# Altium PCB 电机驱动PCB.PcbDoc
Units mil, origin at the board's own origin, x right, y up, seen from the top; angles counter-clockwise.
Board outline 6000 x 4000 mil, 2 copper layers (Top Layer, Bottom Layer); 8 components, 32 nets, 86 pads, 1 vias.
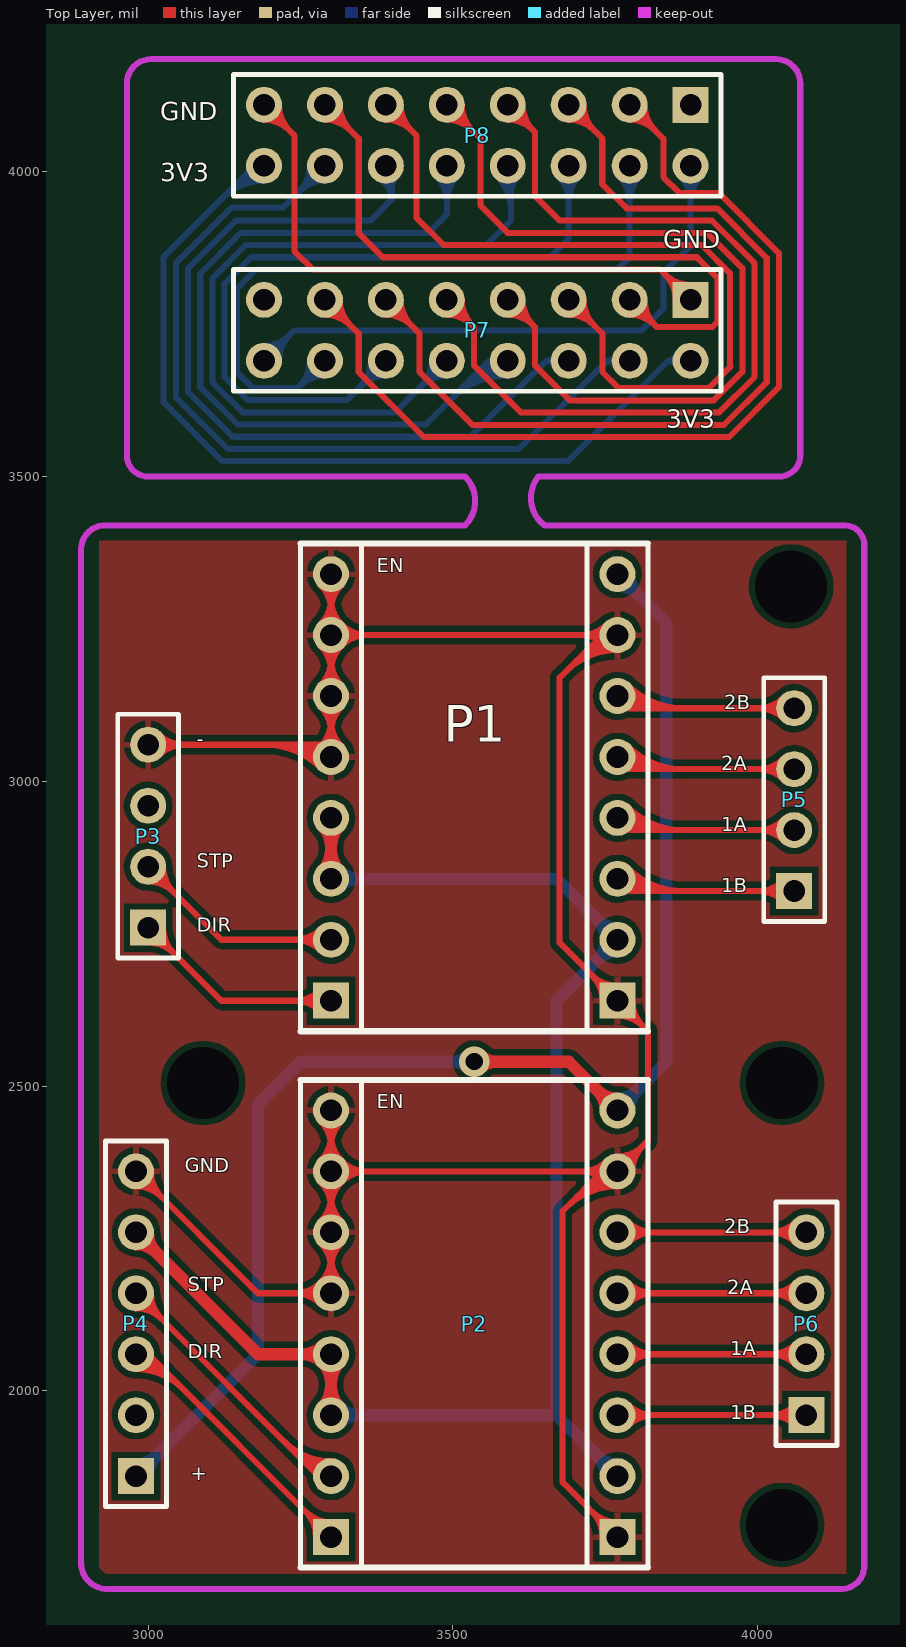
[diagram p0: Top Layer view]
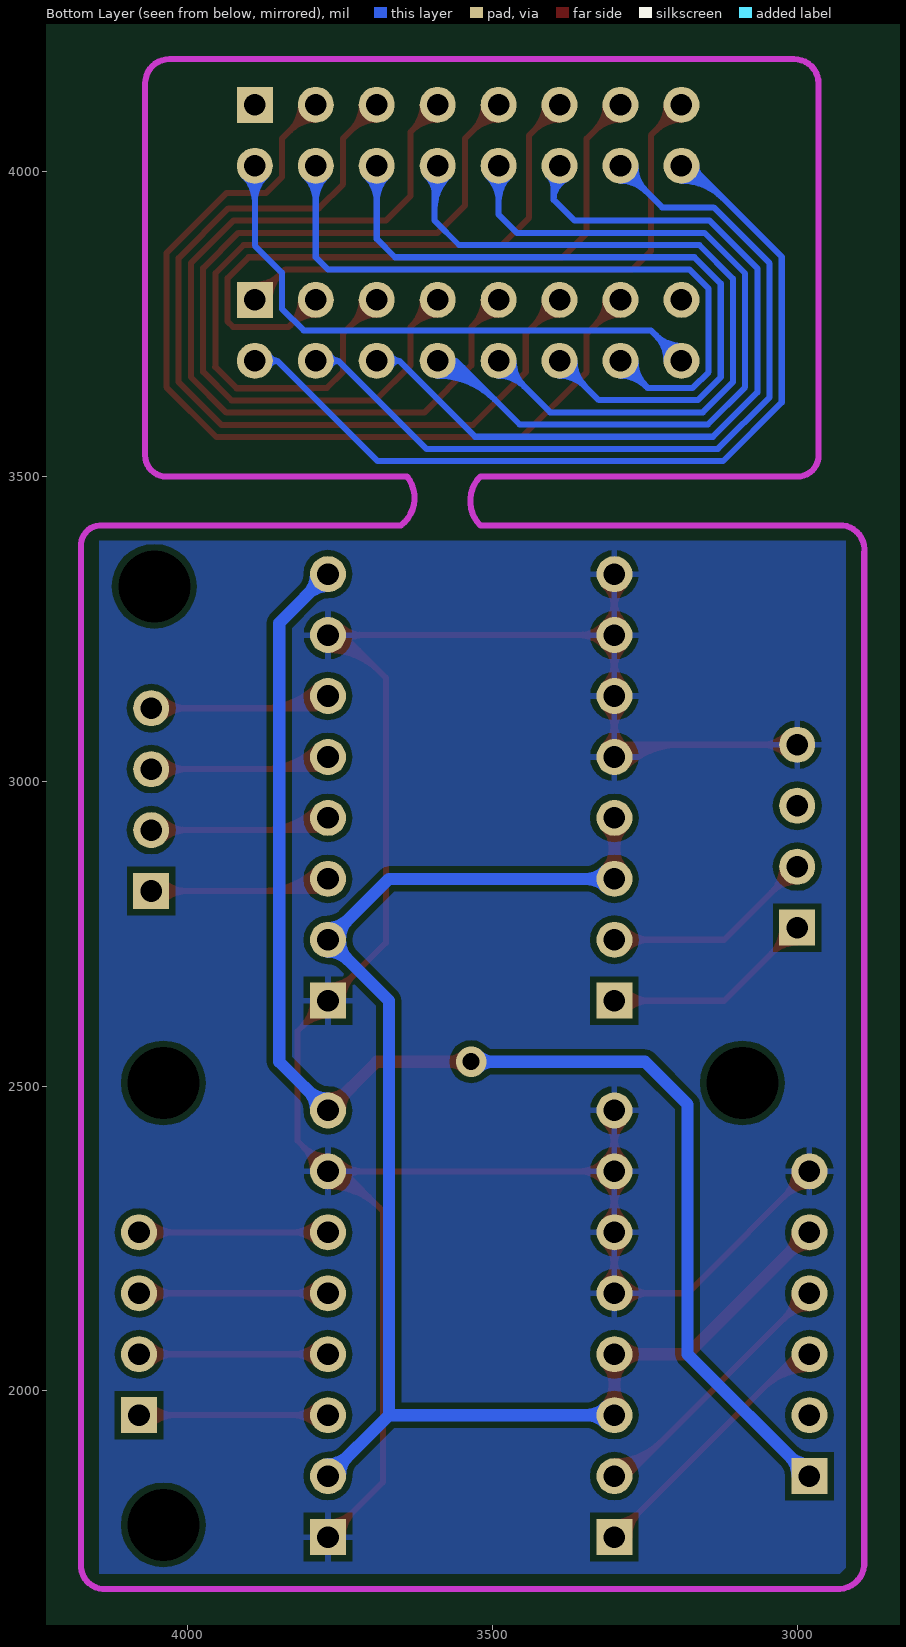
[diagram p1: Bottom Layer view, seen from below]

## Layer stack, top to bottom
Top Layer: signal copper 1.4
Dielectric: dielectric 12.6, FR-4, Dk 4.8
Bottom Layer: signal copper 1.4

## Board outline
1000,1000 7000,1000 7000,5000 1000,5000

## Design rules (kind name [scope] priority, off if disabled: settings)
Clearance [All] p1: gap=10
PolygonConnect [All] p1: connectstyle=Relief reliefconductorwidth=10 reliefentries=4 polygonreliefangle="90 Angle"
RoutingVias [All] p1: holewidth=28 width=50 viastyle="Through Hole" minholewidth=28 minwidth=50 maxholewidth=28 maxwidth=50
SilkscreenOverComponentPads [All] p1: minsilkscreentomaskgap=10
SolderMaskExpansion [All] p1: expansion=4
Width [All] p1: maxlimit=100 minlimit=10 preferedwidth=10
27 further rules are at their usual default settings.

## Components (designator, comment, footprint, x,y, rotation, side; value= is the part's Value field where it differs from the comment)
P1 "A4988 DRIVER" A4988 3300,3140 r0 top
P2 "A4988 DRIVER" A4988 3300,2260 r0 top
P3 "接入口1" HDR1X4 3000,2760 r90 top
P4 "接入口2" HDR1X6 2980,1860 r90 top
P5 "步进电机1" HDR1X4 4060,2820 r90 top
P6 "步进电机2" HDR1X4 4080,1960 r90 top
P7 "OLED" HDR2X8 3890,3790 r180 top
P8 "OLED" HDR2X8 3890,4110 r180 top

## Footprints (in the part's own frame and the unit in brackets; to place one, negate y for a bottom-side part, rotate by r counter-clockwise, add the part's x,y. Pads: shape width x height; smd on the part's side, far side on the other; paste and mask are expansions set on the pad)
A4988 [mm]
  round 1.5 hole 0.9: 1(0,5.08) 2(11.938,5.08) 3(0,2.54) 4(11.938,2.54) 5(0,0) 6(11.938,0) 7(0,-2.54) 8(11.938,-2.54) 9(0,-5.08) 10(11.938,-5.08) 11(0,-7.62) 12(11.938,-7.62) 13(0,-10.16) 14(11.938,-10.16)
  rect 1.5x1.5 hole 0.9: 15(0,-12.7) 16(11.938,-12.7)
  silkscreen extent -1.27,-13.97 13.21,6.35
HDR1X4 [mm]
  rect 1.5x1.5 hole 0.9: 1(0,0)
  round 1.5 hole 0.9: 2(2.54,0) 3(5.08,0) 4(7.62,0)
  silkscreen extent -1.27,-1.27 8.89,1.27
HDR1X6 [mm] "Connector; Header; 6 Position"
  rect 1.5x1.5 hole 0.9: 1(0,0)
  round 1.5 hole 0.9: 2(2.54,0) 3(5.08,0) 4(7.62,0) 5(10.16,0) 6(12.7,0)
  silkscreen extent -1.27,-1.27 13.97,1.27
HDR2X8 [mm] "Connector; Header; 8x2 Position"
  rect 1.5x1.5 hole 0.9: 1(0,0)
  round 1.5 hole 0.9: 2(0,2.54) 3(2.54,0) 4(2.54,2.54) 5(5.08,0) 6(5.08,2.54) 7(7.62,0) 8(7.62,2.54) 9(10.16,0) 10(10.16,2.54) 11(12.7,0) 12(12.7,2.54) 13(15.24,0) 14(15.24,2.54) 15(17.78,0) 16(17.78,2.54)
  silkscreen extent -1.27,-1.27 19.05,3.81

## Part data
P1 P2: "A4988步进电机驱动模块"
P3 P5 P6: library part "Header 4", "Header, 4-Pin"
P4: library part "Header 6", "Header, 6-Pin"
P7 P8: library part "Header 8X2", "Header, 8-Pin, Dual row"

## Free pads (board coordinates)
  round 60 hole 118.11: 0(3090,2505) 0(4040,1780) 0(4040,2505) 0(4055,3320)

## Via types
v1: diameter 50, hole 28, Top Layer to Bottom Layer, 1 vias

## Nets (pads, with @x,y where several pads share a name; then routed paths per layer and width w, separated by ;. In a path a pad name is that pad's centre, name@x,y a point inside that pad or via, vN(x,y) a via of type N, cw(c..) or ccw(c..) an arc to the next point about the centre after c; other vN are vias at no path point)
1A1: P1.10 P5.2 | length 733.2
  Top Layer w10: P1.10@3766.13,2936.13 ccw(c3805.07,2975.07) 3805.07,2920 ; P1.10 3790,2920 P5.2 ; P1.10@3773.2,2943.2 ccw(c3829.21,2999.21) 3829.21,2920 ; P1.10@3780.27,2950.27 ccw(c3853.36,3023.36) 3853.36,2920 ; P1.10@3787.34,2957.34 ccw(c3877.5,3047.5) 3877.5,2920 ; P5.2@4042.66,2902.66 ccw(c4000.79,2860.79) 4000.79,2920 ccw(c4000.79,2979.21) P5.2@4042.66,2937.34 ; P5.2@4049.73,2909.73 ccw(c4024.93,2884.93) 4024.93,2920 ccw(c4024.93,2955.07) P5.2@4049.73,2930.27
1A2: P2.10 P6.2 | length 606.2
  Top Layer w10: P2.10 P6.2 ; P2.10@3780.27,2049.73 cw(c3805.07,2024.93) 3805.07,2060 cw(c3805.07,2095.07) P2.10@3780.27,2070.27 ; P2.10@3787.34,2042.66 cw(c3829.21,2000.79) 3829.21,2060 cw(c3829.21,2119.21) P2.10@3787.34,2077.34 ; P6.2@4062.66,2042.66 ccw(c4020.79,2000.79) 4020.79,2060 ccw(c4020.79,2119.21) P6.2@4062.66,2077.34 ; P6.2@4069.73,2049.73 ccw(c4044.93,2024.93) 4044.93,2060 ccw(c4044.93,2095.07) P6.2@4069.73,2070.27
1B1: P1.12 P5.1 | length 733.2
  Top Layer w10: P1.12@3766.13,2836.13 ccw(c3805.07,2875.07) 3805.07,2820 ; P1.12 3790,2820 P5.1 ; P1.12@3773.2,2843.2 ccw(c3829.21,2899.21) 3829.21,2820 ; P1.12@3780.27,2850.27 ccw(c3853.36,2923.36) 3853.36,2820 ; P1.12@3787.34,2857.34 ccw(c3877.5,2947.5) 3877.5,2820 ; P5.1@4042.66,2802.66 ccw(c4000.79,2760.79) 4000.79,2820 ccw(c4000.79,2879.21) P5.1@4042.66,2837.34 ; P5.1@4049.73,2809.73 ccw(c4024.93,2784.93) 4024.93,2820 ccw(c4024.93,2855.07) P5.1@4049.73,2830.27
1B2: P2.12 P6.1 | length 606.2
  Top Layer w10: P2.12 P6.1 ; P2.12@3780.27,1949.73 cw(c3805.07,1924.93) 3805.07,1960 cw(c3805.07,1995.07) P2.12@3780.27,1970.27 ; P2.12@3787.34,1942.66 cw(c3829.21,1900.79) 3829.21,1960 cw(c3829.21,2019.21) P2.12@3787.34,1977.34 ; P6.1@4062.66,1942.66 ccw(c4020.79,1900.79) 4020.79,1960 ccw(c4020.79,2019.21) P6.1@4062.66,1977.34 ; P6.1@4069.73,1949.73 ccw(c4044.93,1924.93) 4044.93,1960 ccw(c4044.93,1995.07) P6.1@4069.73,1970.27
2A1: P1.8 P5.3 | length 733.2
  Top Layer w10: P1.8@3766.13,3036.13 ccw(c3805.07,3075.07) 3805.07,3020 ; P1.8 3790,3020 P5.3 ; P1.8@3773.2,3043.2 ccw(c3829.21,3099.21) 3829.21,3020 ; P1.8@3780.27,3050.27 ccw(c3853.36,3123.36) 3853.36,3020 ; P1.8@3787.34,3057.34 ccw(c3877.5,3147.5) 3877.5,3020 ; P5.3@4042.66,3002.66 ccw(c4000.79,2960.79) 4000.79,3020 ccw(c4000.79,3079.21) P5.3@4042.66,3037.34 ; P5.3@4049.73,3009.73 ccw(c4024.93,2984.93) 4024.93,3020 ccw(c4024.93,3055.07) P5.3@4049.73,3030.27
2A2: P2.8 P6.3 | length 606.2
  Top Layer w10: P2.8 P6.3 ; P2.8@3780.27,2149.73 cw(c3805.07,2124.93) 3805.07,2160 cw(c3805.07,2195.07) P2.8@3780.27,2170.27 ; P2.8@3787.34,2142.66 cw(c3829.21,2100.79) 3829.21,2160 cw(c3829.21,2219.21) P2.8@3787.34,2177.34 ; P6.3@4062.66,2142.66 ccw(c4020.79,2100.79) 4020.79,2160 ccw(c4020.79,2219.21) P6.3@4062.66,2177.34 ; P6.3@4069.73,2149.73 ccw(c4044.93,2124.93) 4044.93,2160 ccw(c4044.93,2195.07) P6.3@4069.73,2170.27
2B1: P1.6 P5.4 | length 733.2
  Top Layer w10: P1.6@3766.13,3136.13 ccw(c3805.07,3175.07) 3805.07,3120 ; P1.6 3790,3120 P5.4 ; P1.6@3773.2,3143.2 ccw(c3829.21,3199.21) 3829.21,3120 ; P1.6@3780.27,3150.27 ccw(c3853.36,3223.36) 3853.36,3120 ; P1.6@3787.34,3157.34 ccw(c3877.5,3247.5) 3877.5,3120 ; P5.4@4042.66,3102.66 ccw(c4000.79,3060.79) 4000.79,3120 ccw(c4000.79,3179.21) P5.4@4042.66,3137.34 ; P5.4@4049.73,3109.73 ccw(c4024.93,3084.93) 4024.93,3120 ccw(c4024.93,3155.07) P5.4@4049.73,3130.27
2B2: P2.6 P6.4 | length 606.2
  Top Layer w10: P2.6 P6.4 ; P2.6@3780.27,2249.73 cw(c3805.07,2224.93) 3805.07,2260 cw(c3805.07,2295.07) P2.6@3780.27,2270.27 ; P2.6@3787.34,2242.66 cw(c3829.21,2200.79) 3829.21,2260 cw(c3829.21,2319.21) P2.6@3787.34,2277.34 ; P6.4@4062.66,2242.66 ccw(c4020.79,2200.79) 4020.79,2260 ccw(c4020.79,2319.21) P6.4@4062.66,2277.34 ; P6.4@4069.73,2249.73 ccw(c4044.93,2224.93) 4044.93,2260 ccw(c4044.93,2295.07) P6.4@4069.73,2270.27
3.3V: P1.9 P1.11 P1.14 P2.9 P2.11 P2.14 P4.5 | length 3261.7
  Top Layer w20: P4.5@2980,2240.47 cw(c2980,2193.33) 3013.34,2226.66 cw(c3046.67,2260) P4.5@2999.53,2260 ; P4.5 3180,2060 P2.9 P2.11 ; P2.11@3286.19,1973.81 ccw(c3252.86,2007.14) 3300,2007.14 ccw(c3347.14,2007.14) P2.11@3313.81,1973.81 ; P2.9@3286.19,2073.81 cw(c3252.86,2107.14) 3252.86,2060 cw(c3252.86,2012.86) 3286.19,2046.19 cw(c3252.86,2012.86) 3300,2012.86 cw(c3347.14,2012.86) P2.9@3313.81,2046.19 ; P1.11@3286.19,2853.81 ccw(c3252.86,2887.14) 3300,2887.14 ccw(c3347.14,2887.14) P1.11@3313.81,2853.81 ; P1.9@3286.19,2926.19 cw(c3252.86,2892.86) 3300,2892.86 cw(c3347.14,2892.86) P1.9@3313.81,2926.19 ; P1.11 P1.9
  Bottom Layer w20: P2.11 3670,1960 ; P1.11 3670,2840 P1.14 3670,2640 3670,1960 ; P2.11@3313.81,1946.19 cw(c3347.14,1912.86) 3347.14,1960 cw(c3347.14,2007.14) P2.11@3313.81,1973.81 ; P1.11@3313.81,2826.19 cw(c3347.14,2792.86) 3347.14,2840 cw(c3347.14,2887.14) P1.11@3313.81,2853.81 ; P2.14@3750.47,1860 ccw(c3703.33,1860) 3736.66,1893.34 ccw(c3770,1926.67) P2.14@3770,1879.53 ; P2.14 3670,1960 ; P1.14@3770,2720.47 ccw(c3770,2673.33) 3736.66,2706.66 ccw(c3703.33,2740) 3750.47,2740 ccw(c3703.33,2740) 3736.66,2773.34 ccw(c3770,2806.67) P1.14@3770,2759.53
3.3V1: P7.2 P8.16 | length 1660.4
  Bottom Layer w10: 3122.52,3957.52 cw(c3190,3890.04) P8.16@3190,3985.47 ; 3139.59,3974.59 cw(c3190,3924.19) P8.16@3190,3995.47 ; 3156.66,3991.66 cw(c3190,3958.33) P8.16@3190,4005.47 ; 3158.74,3993.74 ccw(c3142.47,4010) P8.16@3165.47,4010 ; P8.16 3175,4010 3025.47,3860.47 3025.47,3621.85 3121.85,3525.47 3688.44,3525.47 3852.97,3690 ; P7.2@3867.42,3680.43 ccw(c3852.97,3674.32) 3852.97,3690 ; P7.2@3867.42,3699.57 cw(c3852.97,3705.68) 3852.97,3690 ; P7.2 3852.97,3690
5V: P1.2 P2.2 P4.1 | length 2701.2
  Top Layer w20: v1(3535,2540) 3690,2540 P2.2 ; v1@3545.61,2529.39 cw(c3571.21,2503.79) 3571.21,2540 cw(c3571.21,2576.21) v1@3545.61,2550.61 ; P2.2@3750.47,2460 ccw(c3703.33,2460) 3736.66,2493.34 ccw(c3770,2526.67) P2.2@3770,2479.53
  Bottom Layer w20: P4.1 3180,2060 3180,2470 3250,2540 v1(3535,2540) ; P4.1@2980,1879.53 ccw(c2980,1926.67) 3013.34,1893.34 ccw(c3046.67,1860) P4.1@2999.53,1860 ; v1@3524.39,2529.39 ccw(c3498.79,2503.79) 3498.79,2540 ccw(c3498.79,2576.21) v1@3524.39,2550.61 ; P2.2 3850,2540 3850,3260 P1.2 ; P2.2@3770,2479.53 ccw(c3770,2526.67) 3803.34,2493.34 ccw(c3836.67,2460) P2.2@3789.53,2460 ; P1.2@3770,3320.47 cw(c3770,3273.33) 3803.34,3306.66 cw(c3836.67,3340) P1.2@3789.53,3340
6V: P3.3
DIR(PB0): P1.15 P3.1 | length 645.9
  Top Layer w10: P3.1@3000,2735.47 cw(c3000,2676.26) 3041.87,2718.13 cw(c3083.74,2760) P3.1@3024.53,2760 ; P3.1@3000,2745.47 cw(c3000,2710.4) 3024.8,2735.2 cw(c3049.6,2760) P3.1@3014.53,2760 ; P3.1 3120,2640 P1.15 ; P1.15@3282.66,2622.66 ccw(c3240.79,2580.79) 3240.79,2640 ccw(c3240.79,2699.21) P1.15@3282.66,2657.34 ; P1.15@3289.73,2629.73 ccw(c3264.93,2604.93) 3264.93,2640 ccw(c3264.93,2675.07) P1.15@3289.73,2650.27
DIR(PE11): P2.15 P4.3 | length 788.8
  Top Layer w10: P4.3@2980,2035.47 cw(c2980,1927.97) 3056.01,2003.99 ; P4.3@2980,2045.47 cw(c2980,1962.12) 3038.94,2021.06 ; P4.3@2980,2055.47 cw(c2980,1996.26) 3021.87,2038.13 ; P4.3 3000,2060 P2.15 ; P2.15@3275.47,1760 ccw(c3216.26,1760) 3258.13,1801.87 ccw(c3300,1843.74) P2.15@3300,1784.53 ; P2.15@3285.47,1760 ccw(c3250.4,1760) 3275.2,1784.8 ccw(c3300,1809.6) P2.15@3300,1774.53
GND: P1.1 P1.3 P1.4 P1.5 P1.7 P1.16 P2.1 P2.3 P2.4 P2.5 P2.7 P2.16 P3.4 P4.6 | length 8122.1
  Top Layer w10: P4.6@2980,2335.47 cw(c2980,2276.26) 3021.87,2318.13 cw(c3063.74,2360) P4.6@3004.53,2360 ; P4.6@2980,2345.47 cw(c2980,2310.4) 3004.8,2335.2 cw(c3029.6,2360) P4.6@2994.53,2360 ; P4.6 3180,2160 P2.7 P2.5 P2.3 ; P3.4 3280,3060 P1.7 P1.5 P1.3 ; P3.4@3010.27,3049.73 cw(c3035.07,3024.93) 3035.07,3060 cw(c3035.07,3095.07) P3.4@3010.27,3070.27 ; P3.4@3017.34,3042.66 cw(c3059.21,3000.79) 3059.21,3060 cw(c3059.21,3119.21) P3.4@3017.34,3077.34 ; 3192.5,3060 cw(c3192.5,2932.5) P1.7@3282.66,3022.66 ; 3216.64,3060 cw(c3216.64,2956.64) P1.7@3289.73,3029.73 ; 3240.79,3060 cw(c3240.79,2980.79) P1.7@3296.8,3036.8 ; 3264.93,3060 cw(c3264.93,3004.93) P1.7@3303.87,3043.87 ; P2.7@3282.66,2142.66 ccw(c3240.79,2100.79) 3240.79,2160 ccw(c3240.79,2219.21) 3282.66,2177.34 ccw(c3240.79,2219.21) 3300,2219.21 ccw(c3359.21,2219.21) P2.7@3317.34,2177.34 ; P2.5@3282.66,2242.66 cw(c3240.79,2200.79) 3300,2200.79 cw(c3359.21,2200.79) P2.5@3317.34,2242.66 ; P2.5@3282.66,2277.34 ccw(c3240.79,2319.21) 3300,2319.21 ccw(c3359.21,2319.21) P2.5@3317.34,2277.34 ; P2.3@3282.66,2342.66 cw(c3240.79,2300.79) 3300,2300.79 cw(c3359.21,2300.79) 3317.34,2342.66 cw(c3359.21,2300.79) 3359.21,2360 cw(c3359.21,2419.21) 3317.34,2377.34 cw(c3359.21,2419.21) 3300,2419.21 cw(c3240.79,2419.21) P2.3@3282.66,2377.34 ; P2.1@3282.66,2442.66 cw(c3240.79,2400.79) 3300,2400.79 cw(c3359.21,2400.79) P2.1@3317.34,2442.66 ; P1.7@3282.66,3057.34 ccw(c3240.79,3099.21) 3300,3099.21 ccw(c3359.21,3099.21) P1.7@3317.34,3057.34 ; P1.5@3282.66,3122.66 cw(c3240.79,3080.79) 3300,3080.79 cw(c3359.21,3080.79) P1.5@3317.34,3122.66 ; P1.5@3282.66,3157.34 ccw(c3240.79,3199.21) 3300,3199.21 ccw(c3359.21,3199.21) P1.5@3317.34,3157.34 ; P1.3@3282.66,3222.66 cw(c3240.79,3180.79) 3300,3180.79 cw(c3359.21,3180.79) 3317.34,3222.66 cw(c3359.21,3180.79) 3359.21,3240 cw(c3359.21,3299.21) 3317.34,3257.34 cw(c3359.21,3299.21) 3300,3299.21 cw(c3240.79,3299.21) P1.3@3282.66,3257.34 ; P1.1@3282.66,3322.66 cw(c3240.79,3280.79) 3300,3280.79 cw(c3359.21,3280.79) P1.1@3317.34,3322.66 ; P2.7@3289.73,2149.73 ccw(c3264.93,2124.93) 3264.93,2160 ccw(c3264.93,2195.07) 3289.73,2170.27 ccw(c3264.93,2195.07) 3300,2195.07 ccw(c3335.07,2195.07) P2.7@3310.27,2170.27 ; P2.5@3289.73,2249.73 cw(c3264.93,2224.93) 3300,2224.93 cw(c3335.07,2224.93) P2.5@3310.27,2249.73 ; P2.5@3289.73,2270.27 ccw(c3264.93,2295.07) 3300,2295.07 ccw(c3335.07,2295.07) P2.5@3310.27,2270.27 ; P2.3@3289.73,2349.73 cw(c3264.93,2324.93) 3300,2324.93 cw(c3335.07,2324.93) 3310.27,2349.73 cw(c3335.07,2324.93) 3335.07,2360 cw(c3335.07,2395.07) 3310.27,2370.27 cw(c3335.07,2395.07) 3300,2395.07 cw(c3264.93,2395.07) P2.3@3289.73,2370.27 ; P2.1@3289.73,2449.73 cw(c3264.93,2424.93) 3300,2424.93 cw(c3335.07,2424.93) P2.1@3310.27,2449.73 ; P1.7@3289.73,3050.27 ccw(c3264.93,3075.07) 3300,3075.07 ccw(c3335.07,3075.07) P1.7@3310.27,3050.27 ; P1.5@3289.73,3129.73 cw(c3264.93,3104.93) 3300,3104.93 cw(c3335.07,3104.93) P1.5@3310.27,3129.73 ; P1.5@3289.73,3150.27 ccw(c3264.93,3175.07) 3300,3175.07 ccw(c3335.07,3175.07) P1.5@3310.27,3150.27 ; P1.3@3289.73,3229.73 cw(c3264.93,3204.93) 3300,3204.93 cw(c3335.07,3204.93) 3310.27,3229.73 cw(c3335.07,3204.93) 3335.07,3240 cw(c3335.07,3275.07) 3310.27,3250.27 cw(c3335.07,3275.07) 3300,3275.07 cw(c3264.93,3275.07) P1.3@3289.73,3250.27 ; P1.1@3289.73,3329.73 cw(c3264.93,3304.93) 3300,3304.93 cw(c3335.07,3304.93) P1.1@3310.27,3329.73 ; P2.1 P2.3 ; P1.1 P1.3 ; 3685.45,2300.45 cw(c3770,2215.9) P2.4@3770,2335.47 ; 3685.45,3180.45 cw(c3770,3095.9) P1.4@3770,3215.47 ; 3702.52,2317.52 cw(c3770,2250.04) P2.4@3770,2345.47 ; 3702.52,3197.52 cw(c3770,3130.04) P1.4@3770,3225.47 ; 3719.59,2334.59 cw(c3770,2284.19) P2.4@3770,2355.47 ; 3719.59,3214.59 cw(c3770,3164.19) P1.4@3770,3235.47 ; 3736.66,2351.66 cw(c3770,2318.33) P2.4@3770,2365.47 ; 3736.66,3231.66 cw(c3770,3198.33) P1.4@3770,3245.47 ; P2.16@3745.47,1760 ccw(c3686.26,1760) 3728.13,1801.87 ccw(c3770,1843.74) P2.16@3770,1784.53 ; P1.16@3745.47,2640 ccw(c3686.26,2640) 3728.13,2681.87 ccw(c3770,2723.74) P1.16@3770,2664.53 ; P2.4@3752.66,2342.66 ccw(c3710.79,2300.79) 3710.79,2360 ccw(c3710.79,2419.21) P2.4@3752.66,2377.34 ; P1.4@3752.66,3222.66 ccw(c3710.79,3180.79) 3710.79,3240 ccw(c3710.79,3299.21) P1.4@3752.66,3257.34 ; P2.16@3755.47,1760 ccw(c3720.4,1760) 3745.2,1784.8 ccw(c3770,1809.6) P2.16@3770,1774.53 ; P1.16@3755.47,2640 ccw(c3720.4,2640) 3745.2,2664.8 ccw(c3770,2689.6) P1.16@3770,2654.53 ; P2.4@3759.73,2349.73 ccw(c3734.93,2324.93) 3734.93,2360 ccw(c3734.93,2395.07) P2.4@3759.73,2370.27 ; P1.4@3759.73,3229.73 ccw(c3734.93,3204.93) 3734.93,3240 ccw(c3734.93,3275.07) P1.4@3759.73,3250.27 ; P2.16 3680,1850 3680,2295 P2.4@3745,2360 ; P2.4@3770,2374.53 ccw(c3770,2409.6) 3794.8,2384.8 ccw(c3819.6,2360) P2.4@3784.53,2360 ; P2.4@3770,2384.53 ccw(c3770,2443.74) 3811.87,2401.87 ccw(c3853.74,2360) P2.4@3794.53,2360 ; P1.16@3770,2615.47 cw(c3770,2556.26) 3811.87,2598.13 cw(c3853.74,2640) P1.16@3794.53,2640 ; P1.16@3770,2625.47 cw(c3770,2590.4) 3794.8,2615.2 cw(c3819.6,2640) P1.16@3784.53,2640 ; P1.4 P1.4@3745,3240 ; P2.3 P2.4@3745,2360 ; P1.3 P1.4@3745,3240 ; P2.4@3745,2360 P2.4 3820,2410 3820,2590 P1.16 3675,2735 3675,3170 P1.4@3745,3240
GND1: P7.1 P8.15 | length 1240.1
  Top Layer w10: P8.15@3190,4085.47 cw(c3190,4026.26) 3231.87,4068.13 cw(c3273.74,4110) P8.15@3214.53,4110 ; P8.15@3190,4095.47 cw(c3190,4060.4) 3214.8,4085.2 cw(c3239.6,4110) P8.15@3204.53,4110 ; P8.15 3240,4060 3240,3870 3270,3840 3840,3840 P7.1 ; P7.1@3865.47,3790 ccw(c3806.26,3790) 3848.13,3831.87 ccw(c3890,3873.74) P7.1@3890,3814.53 ; P7.1@3875.47,3790 ccw(c3840.4,3790) 3865.2,3814.8 ccw(c3890,3839.6) P7.1@3890,3804.53
OLED_CS(PD6): P7.4 P8.14 | length 1554.9
  Bottom Layer w10: P8.14@3265.47,4010 cw(c3206.26,4010) 3248.13,3968.13 cw(c3290,3926.26) P8.14@3290,3985.47 ; P8.14@3275.47,4010 cw(c3240.4,4010) 3265.2,3985.2 cw(c3290,3960.4) P8.14@3290,3995.47 ; P8.14 3221.64,3941.64 3137.25,3941.64 3045.47,3849.86 3045.47,3630.14 3130.14,3545.47 3608.44,3545.47 3752.97,3690 ; P7.4@3767.42,3680.43 ccw(c3752.97,3674.32) 3752.97,3690 ; P7.4@3767.42,3699.57 cw(c3752.97,3705.68) 3752.97,3690 ; P7.4 3752.97,3690
OLED_D0(PC0): P7.7 P8.9 | length 1636.4
  Top Layer w10: P8.9@3490,4085.47 cw(c3490,4026.26) 3531.87,4068.13 cw(c3573.74,4110) P8.9@3514.53,4110 ; P8.9@3490,4095.47 cw(c3490,4060.4) 3514.8,4085.2 cw(c3539.6,4110) P8.9@3504.53,4110 ; P8.9 3545,4055 3545,3945 3590,3900 3916.84,3900 3975,3841.84 3975,3671.72 3928.28,3625 3692.03,3625 3634.53,3682.5 3634.53,3745.47 P7.7 ; P7.7@3590,3765.47 cw(c3590,3706.26) 3631.87,3748.13 cw(c3673.74,3790) P7.7@3614.53,3790 ; P7.7@3590,3775.47 cw(c3590,3740.4) 3614.8,3765.2 cw(c3639.6,3790) P7.7@3604.53,3790
OLED_D1(PC1): P7.10 P8.8 | length 1513.1
  Bottom Layer w10: P7.10@3465.47,3690 cw(c3406.26,3690) 3448.13,3648.13 cw(c3490,3606.26) P7.10@3490,3665.47 ; P7.10@3475.47,3690 cw(c3440.4,3690) 3465.2,3665.2 cw(c3490,3640.4) P7.10@3490,3675.47 ; P7.10 3405.47,3605.47 3154.99,3605.47 3105.47,3654.99 3105.47,3825.01 3160.46,3880 3555,3880 3595,3920 3595,4005 P8.8 ; P8.8@3572.66,3992.66 cw(c3518.71,3938.71) 3595,3938.71 ; P8.8@3579.73,3999.73 cw(c3542.86,3962.86) 3595,3962.86 cw(c3637.14,3962.86) P8.8@3607.34,3992.66
OLED_D2(PC2): P7.9 P8.7 | length 1699.8
  Top Layer w10: P7.9@3490,3765.47 cw(c3490,3706.26) 3531.87,3748.13 cw(c3573.74,3790) P7.9@3514.53,3790 ; P7.9@3490,3775.47 cw(c3490,3740.4) 3514.8,3765.2 cw(c3539.6,3790) P7.9@3504.53,3790 ; P7.9 3534.53,3745.47 3534.53,3682.5 3612.03,3605 3936.57,3605 3995,3663.43 3995,3850.12 3925.12,3920 3675,3920 3634.53,3960.47 3634.53,4065.47 P8.7 ; P8.7@3590,4085.47 cw(c3590,4026.26) 3631.87,4068.13 cw(c3673.74,4110) P8.7@3614.53,4110 ; P8.7@3590,4095.47 cw(c3590,4060.4) 3614.8,4085.2 cw(c3639.6,4110) P8.7@3604.53,4110
OLED_D3(PC3): P7.12 P8.6 | length 1471.5
  Bottom Layer w10: P7.12@3365.47,3690 cw(c3306.26,3690) 3348.13,3648.13 cw(c3390,3606.26) P7.12@3390,3665.47 ; P7.12@3375.47,3690 cw(c3340.4,3690) 3365.2,3665.2 cw(c3390,3640.4) P7.12@3390,3675.47 ; P7.12 3325.47,3625.47 3163.27,3625.47 3125.47,3663.27 3125.47,3816.73 3168.74,3860 3660,3860 3690,3890 P8.6 ; P8.6@3672.66,3992.66 cw(c3630.79,3950.79) 3690,3950.79 cw(c3749.21,3950.79) P8.6@3707.34,3992.66 ; P8.6@3679.73,3999.73 cw(c3654.93,3974.93) 3690,3974.93 cw(c3725.07,3974.93) P8.6@3700.27,3999.73
OLED_D4(PC4): P7.11 P8.5 | length 1748.5
  Top Layer w10: P7.11@3390,3765.47 cw(c3390,3706.26) 3431.87,3748.13 cw(c3473.74,3790) P7.11@3414.53,3790 ; P7.11@3390,3775.47 cw(c3390,3740.4) 3414.8,3765.2 cw(c3439.6,3790) P7.11@3404.53,3790 ; P7.11 3445.47,3734.53 3445.47,3671.56 3532.03,3585 3944.85,3585 4015,3655.15 4015,3858.41 3933.41,3940 3785,3940 3745,3980 3745,4055 P8.5 ; P8.5@3690,4085.47 cw(c3690,4026.26) 3731.87,4068.13 cw(c3773.74,4110) P8.5@3714.53,4110 ; P8.5@3690,4095.47 cw(c3690,4060.4) 3714.8,4085.2 cw(c3739.6,4110) P8.5@3704.53,4110
OLED_D5(PC5): P7.14 P8.4 | length 1422.8
  Bottom Layer w10: P7.14@3265.47,3690 cw(c3206.26,3690) 3248.13,3648.13 cw(c3290,3606.26) P7.14@3290,3665.47 ; P7.14@3275.47,3690 cw(c3240.4,3690) 3265.2,3665.2 cw(c3290,3640.4) P7.14@3290,3675.47 ; P7.14 3245.47,3645.47 3171.56,3645.47 3145.47,3671.56 3145.47,3808.44 3177.03,3840 3770,3840 3790,3860 P8.4 ; P8.4@3772.66,3992.66 cw(c3730.79,3950.79) 3790,3950.79 cw(c3849.21,3950.79) P8.4@3807.34,3992.66 ; P8.4@3779.73,3999.73 cw(c3754.93,3974.93) 3790,3974.93 cw(c3825.07,3974.93) P8.4@3800.27,3999.73
OLED_D6(PC6): P7.13 P8.3 | length 1807.7
  Top Layer w10: P7.13@3290,3765.47 cw(c3290,3706.26) 3331.87,3748.13 cw(c3373.74,3790) P7.13@3314.53,3790 ; P7.13@3290,3775.47 cw(c3290,3740.4) 3314.8,3765.2 cw(c3339.6,3790) P7.13@3304.53,3790 ; P7.13 3345.47,3734.53 3345.47,3671.56 3452.03,3565 3953.14,3565 4035,3646.86 4035,3866.69 3936.22,3965.47 3871.56,3965.47 3845.47,3991.56 3845.47,4054.53 P8.3 ; P8.3@3790,4085.47 cw(c3790,4026.26) 3831.87,4068.13 cw(c3873.74,4110) P8.3@3814.53,4110 ; P8.3@3790,4095.47 cw(c3790,4060.4) 3814.8,4085.2 cw(c3839.6,4110) P8.3@3804.53,4110
OLED_D7(PC7): P7.16 P8.2 | length 1240.1
  Bottom Layer w10: P7.16 3240,3740 3810,3740 3845.47,3775.47 3845.47,3834.53 3890,3879.06 P8.2 ; P7.16@3190,3704.53 ccw(c3190,3739.6) 3214.8,3714.8 ccw(c3239.6,3690) P7.16@3204.53,3690 ; P7.16@3190,3714.53 ccw(c3190,3773.74) 3231.87,3731.87 ccw(c3273.74,3690) P7.16@3214.53,3690 ; P8.2@3872.66,3992.66 cw(c3830.79,3950.79) 3890,3950.79 cw(c3949.21,3950.79) P8.2@3907.34,3992.66 ; P8.2@3879.73,3999.73 cw(c3854.93,3974.93) 3890,3974.93 cw(c3925.07,3974.93) P8.2@3900.27,3999.73
OLED_DC(PD3): P7.3 P8.13 | length 1387.4
  Top Layer w10: P8.13@3290,4085.47 cw(c3290,4026.26) 3331.87,4068.13 cw(c3373.74,4110) P8.13@3314.53,4110 ; P8.13@3290,4095.47 cw(c3290,4060.4) 3314.8,4085.2 cw(c3339.6,4110) P8.13@3304.53,4110 ; P8.13 3345.47,4054.53 3345.47,3899.53 3385,3860 3900.27,3860 3934.53,3825.74 3934.53,3754.26 3925.74,3745.47 3834.53,3745.47 P7.3 ; P7.3@3790,3765.47 cw(c3790,3706.26) 3831.87,3748.13 cw(c3873.74,3790) P7.3@3814.53,3790 ; P7.3@3790,3775.47 cw(c3790,3740.4) 3814.8,3765.2 cw(c3839.6,3790) P7.3@3804.53,3790
OLED_RD(PG13): P7.5 P8.11 | length 1584.8
  Top Layer w10: P8.11@3390,4085.47 cw(c3390,4026.26) 3431.87,4068.13 cw(c3473.74,4110) P8.11@3414.53,4110 ; P8.11@3390,4095.47 cw(c3390,4060.4) 3414.8,4085.2 cw(c3439.6,4110) P8.11@3404.53,4110 ; P8.11 3440,4060 3440,3925 3485,3880 3908.55,3880 3954.53,3834.03 3954.53,3680.47 3955,3680 3920,3645 3795,3645 3794.53,3645.47 3771.56,3645.47 3745.47,3671.56 3745.47,3734.53 P7.5 ; P7.5@3690,3765.47 cw(c3690,3706.26) 3731.87,3748.13 cw(c3773.74,3790) P7.5@3714.53,3790 ; P7.5@3690,3775.47 cw(c3690,3740.4) 3714.8,3765.2 cw(c3739.6,3790) P7.5@3704.53,3790
OLED_RST(PG15): P7.8 P8.10 | length 1732.3
  Bottom Layer w10: P8.10@3472.66,3992.66 cw(c3430.79,3950.79) 3490,3950.79 cw(c3549.21,3950.79) P8.10@3507.34,3992.66 ; P8.10@3479.73,3999.73 cw(c3454.93,3974.93) 3490,3974.93 cw(c3525.07,3974.93) P8.10@3500.27,3999.73 ; P8.10 3490,3930 3460,3900 3152.18,3900 3085.47,3833.3 3085.47,3646.7 3146.7,3585.47 3455.47,3585.47 3560,3690 P7.8 ; 3496.92,3626.92 cw(c3590,3533.83) P7.8@3590,3665.47 ; 3513.99,3643.99 cw(c3590,3567.97) P7.8@3590,3675.47 ; 3531.06,3661.06 cw(c3590,3602.12) P7.8@3590,3685.47 ; 3548.13,3678.13 cw(c3590,3636.26) P7.8@3590,3695.47
OLED_RW(PG14): P7.6 P8.12 | length 1481.6
  Bottom Layer w10: P8.12@3379.02,3988.07 cw(c3362.01,3954.1) 3400,3954.1 ; P8.12@3383.5,3997.01 cw(c3370.12,3970.29) 3400,3970.29 ; P8.12 3400,4000 3400,3955 3365,3920 3143.89,3920 3065.47,3841.58 3065.47,3638.42 3138.42,3565.47 3528.44,3565.47 3652.97,3690 ; 3400,3974.93 cw(c3425.07,3974.93) P8.12@3407.34,3992.66 ; P7.6@3667.42,3680.43 ccw(c3652.97,3674.32) 3652.97,3690 ; P7.6@3667.42,3699.57 cw(c3652.97,3705.68) 3652.97,3690 ; P7.6 3652.97,3690
OUT3(PE13): P4.2
STP(PB3): P1.13 P3.2 | length 645.9
  Top Layer w10: P3.2@3000,2835.47 cw(c3000,2776.26) 3041.87,2818.13 cw(c3083.74,2860) P3.2@3024.53,2860 ; P3.2@3000,2845.47 cw(c3000,2810.4) 3024.8,2835.2 cw(c3049.6,2860) P3.2@3014.53,2860 ; P3.2 3120,2740 P1.13 ; P1.13@3282.66,2722.66 ccw(c3240.79,2680.79) 3240.79,2740 ccw(c3240.79,2799.21) P1.13@3282.66,2757.34 ; P1.13@3289.73,2729.73 ccw(c3264.93,2704.93) 3264.93,2740 ccw(c3264.93,2775.07) P1.13@3289.73,2750.27
STP(PE9): P2.13 P4.4 | length 788.8
  Top Layer w10: P4.4@2980,2135.47 cw(c2980,2076.26) 3021.87,2118.13 cw(c3063.74,2160) P4.4@3004.53,2160 ; P4.4@2980,2145.47 cw(c2980,2110.4) 3004.8,2135.2 cw(c3029.6,2160) P4.4@2994.53,2160 ; P4.4 3280,1860 P2.13 ; 3223.99,1916.01 ccw(c3300,1992.03) P2.13@3300,1884.53 ; 3241.06,1898.94 ccw(c3300,1957.88) P2.13@3300,1874.53 ; 3258.13,1881.87 ccw(c3300,1923.74) P2.13@3300,1864.53
pads on no net: P7.15 P8.1

## Polygon pours and split planes (outlines as drawn)
GND on Top Layer "Top Overlay-No Net" (solid, remove dead copper, pour order 1000): 2920,3395 4145,3395 4145,1700 2930,1700 2920,1710 2920,3395
GND on Bottom Layer "Top Overlay-No Net" (solid, remove dead copper, pour order 1001): 2920,3395 4145,3395 4145,1700 2930,1700 2920,1710 2920,3395

## Keep-outs
Keep-Out Layer:
  lines w10: 2890,1715 2890,3375 cw(c2930,3380) 2925,3420 3520,3420 ccw(c3480,3460) 3520,3500 3241.25,3500 3000,3500 cw(c3000,3535) 2965,3535 2965,4145 cw(c3005,4145) 3005,4185 4000,4185 4030,4185 cw(c4030,4145) 4070,4145 4070,3535 cw(c4035,3535) 4035,3500 3920,3500 3693.75,3500 3640,3500 ccw(c3685,3465) 3650,3420 4140,3420 cw(c4142.5,3387.5) 4175,3390 4175,1715 cw(c4137.5,1712.5) 4140,1675 2930,1675 cw(c2932.5,1717.5) 2890,1720

## Silkscreen, mask and mechanical layers (free items; w line width, h text height)
Top Overlay:
  text "GND" at 3020,4085 h30
  text "3V3" at 3020,3985 h30
  text "GND" at 3845,3875 h30
  text "3V3" at 3850,3580 h30
  text "2B" at 3945,3110 h40
  text "-" at 3080,3050 h40
  text "2A" at 3940,3010 h40
  text "1A" at 3940,2910 h40
  text "STP" at 3080,2850 h40
  text "1B" at 3940,2810 h40
  text "DIR" at 3080,2745 h40
  text "GND" at 3060,2350 h40
  text "2B" at 3945,2250 h40
  text "STP" at 3065,2155 h40
  text "2A" at 3950,2150 h40
  text "1A" at 3955,2050 h40
  text "DIR" at 3065,2045 h40
  text "1B" at 3955,1945 h40
  text "+" at 3070,1845 h40
Mechanical 1:
  lines w10: 2890,1715 ccw(c2930,1715) 2930,1675 ; 2890,1715 2890,3380 ; 2890,1715 2890,3380 ; 2890,1715 2890,3380 ; 2890,3380 cw(c2930,3380) 2930,3420 ; 2930,1675 4140,1675 ; 2930,1675 4140,1675 ; 2930,1675 4140,1675 ; 2930,3420 3520,3420 ; 2930,3420 3520,3420 ; 2930,3420 3520,3420 ; 3520,3420 ccw(c3480,3460) 3520,3500 3000,3500 cw(c3002.5,3537.5) 2965,3540 2965,4145 cw(c3005,4145) 3005,4185 4030,4185 cw(c4030,4145) 4070,4145 4070,3535 cw(c4035,3535) 4035,3500 3640,3500 ccw(c3685,3465) 3650,3420 ; 3650,3420 4145,3420 ; 3650,3420 4145,3420 ; 3650,3420 4145,3420 ; 4140,1675 ccw(c4137.5,1712.5) 4175,1715 ; 4145,3420 cw(c4145,3390) 4175,3390 ; 4175,1715 4175,3390 ; 4175,1715 4175,3390 ; 4175,1715 4175,3390

## Text inside footprints (layer, text, board x,y; h text height)
P1: Top Overlay "EN" at 3375,3335 h40
P2: Top Overlay "EN" at 3375,2455 h40